# Altium PCB digital_input_module.PcbDoc
Units mm, origin at the board's own origin, x right, y up, seen from the top; angles counter-clockwise.
Board outline 50 x 40 mm, 2 copper layers (Top Layer, Bottom Layer); 46 components, 27 nets, 116 pads, 44 vias.
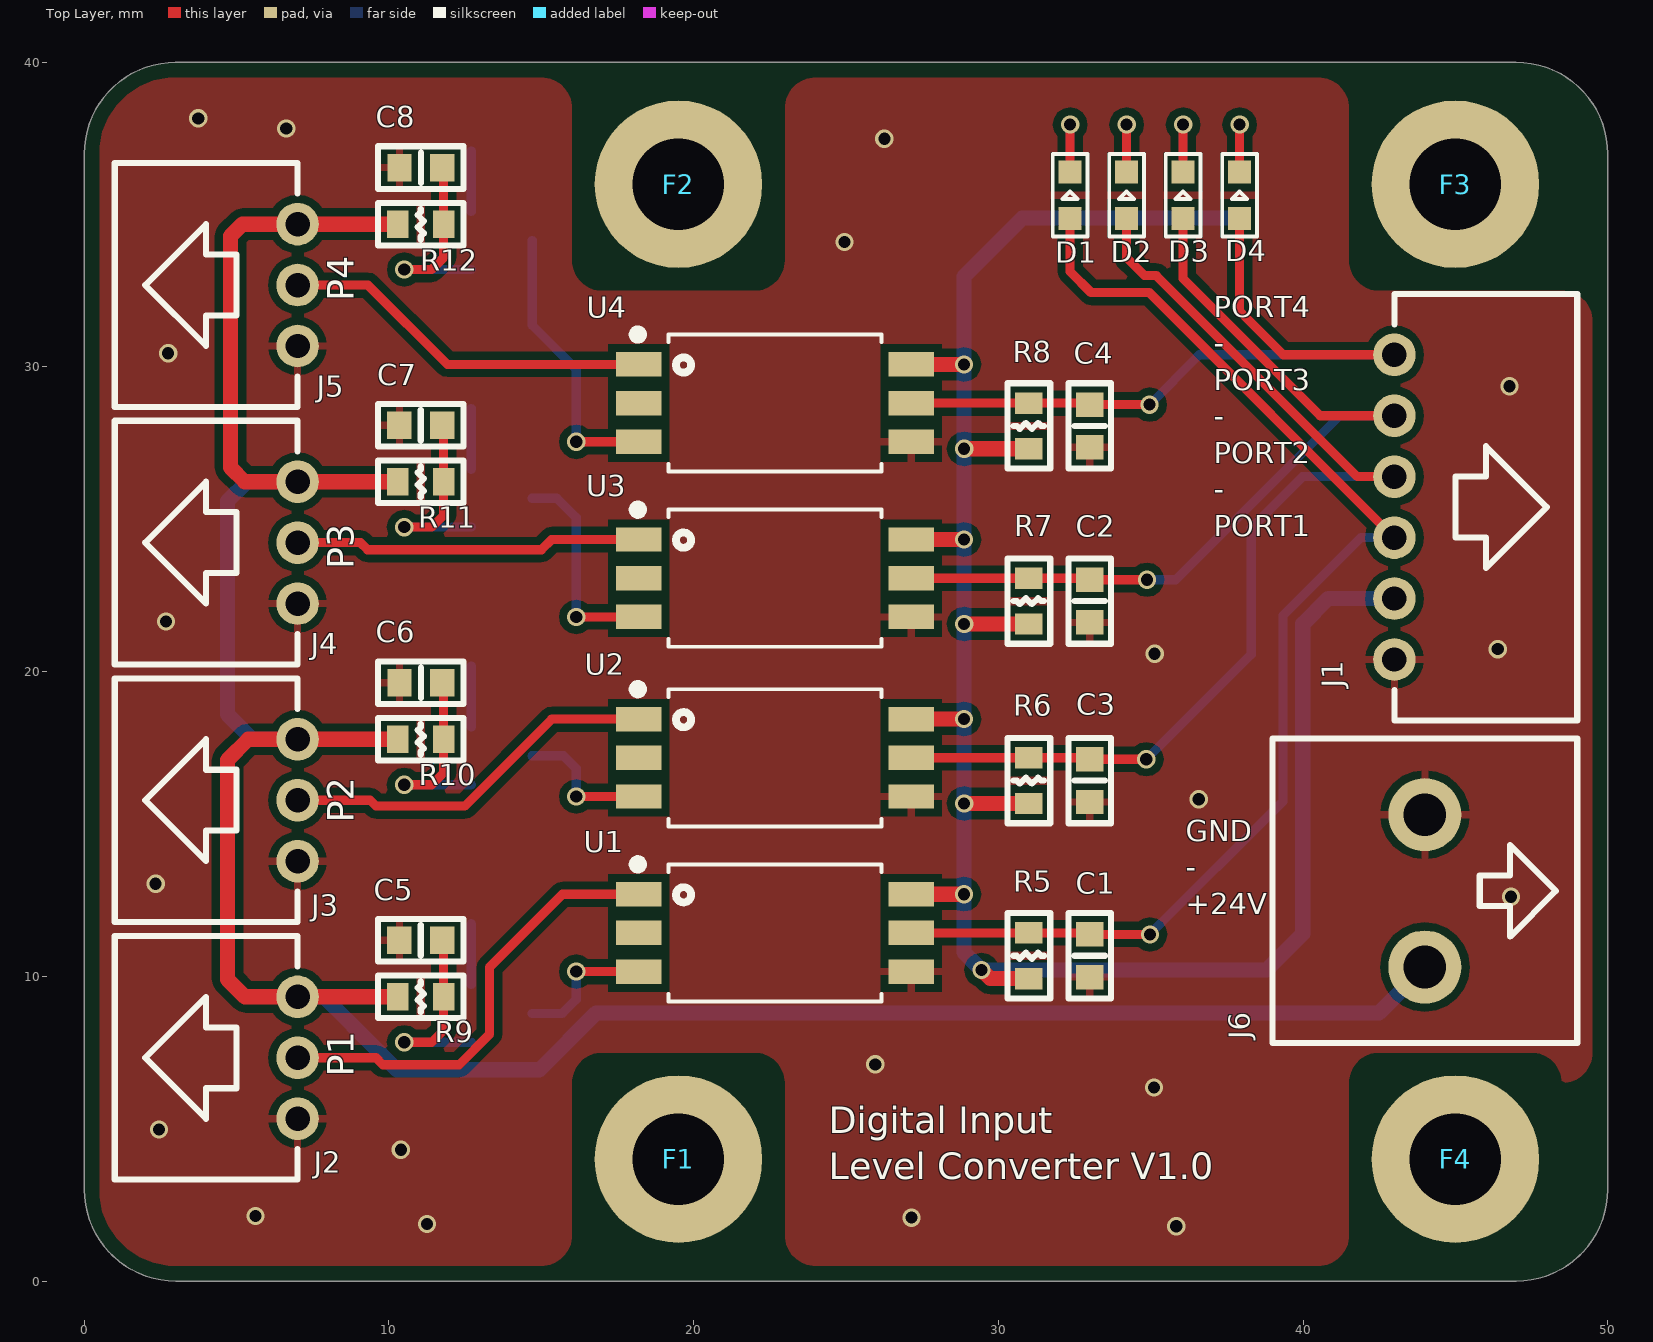
[diagram p0: Top Layer view]
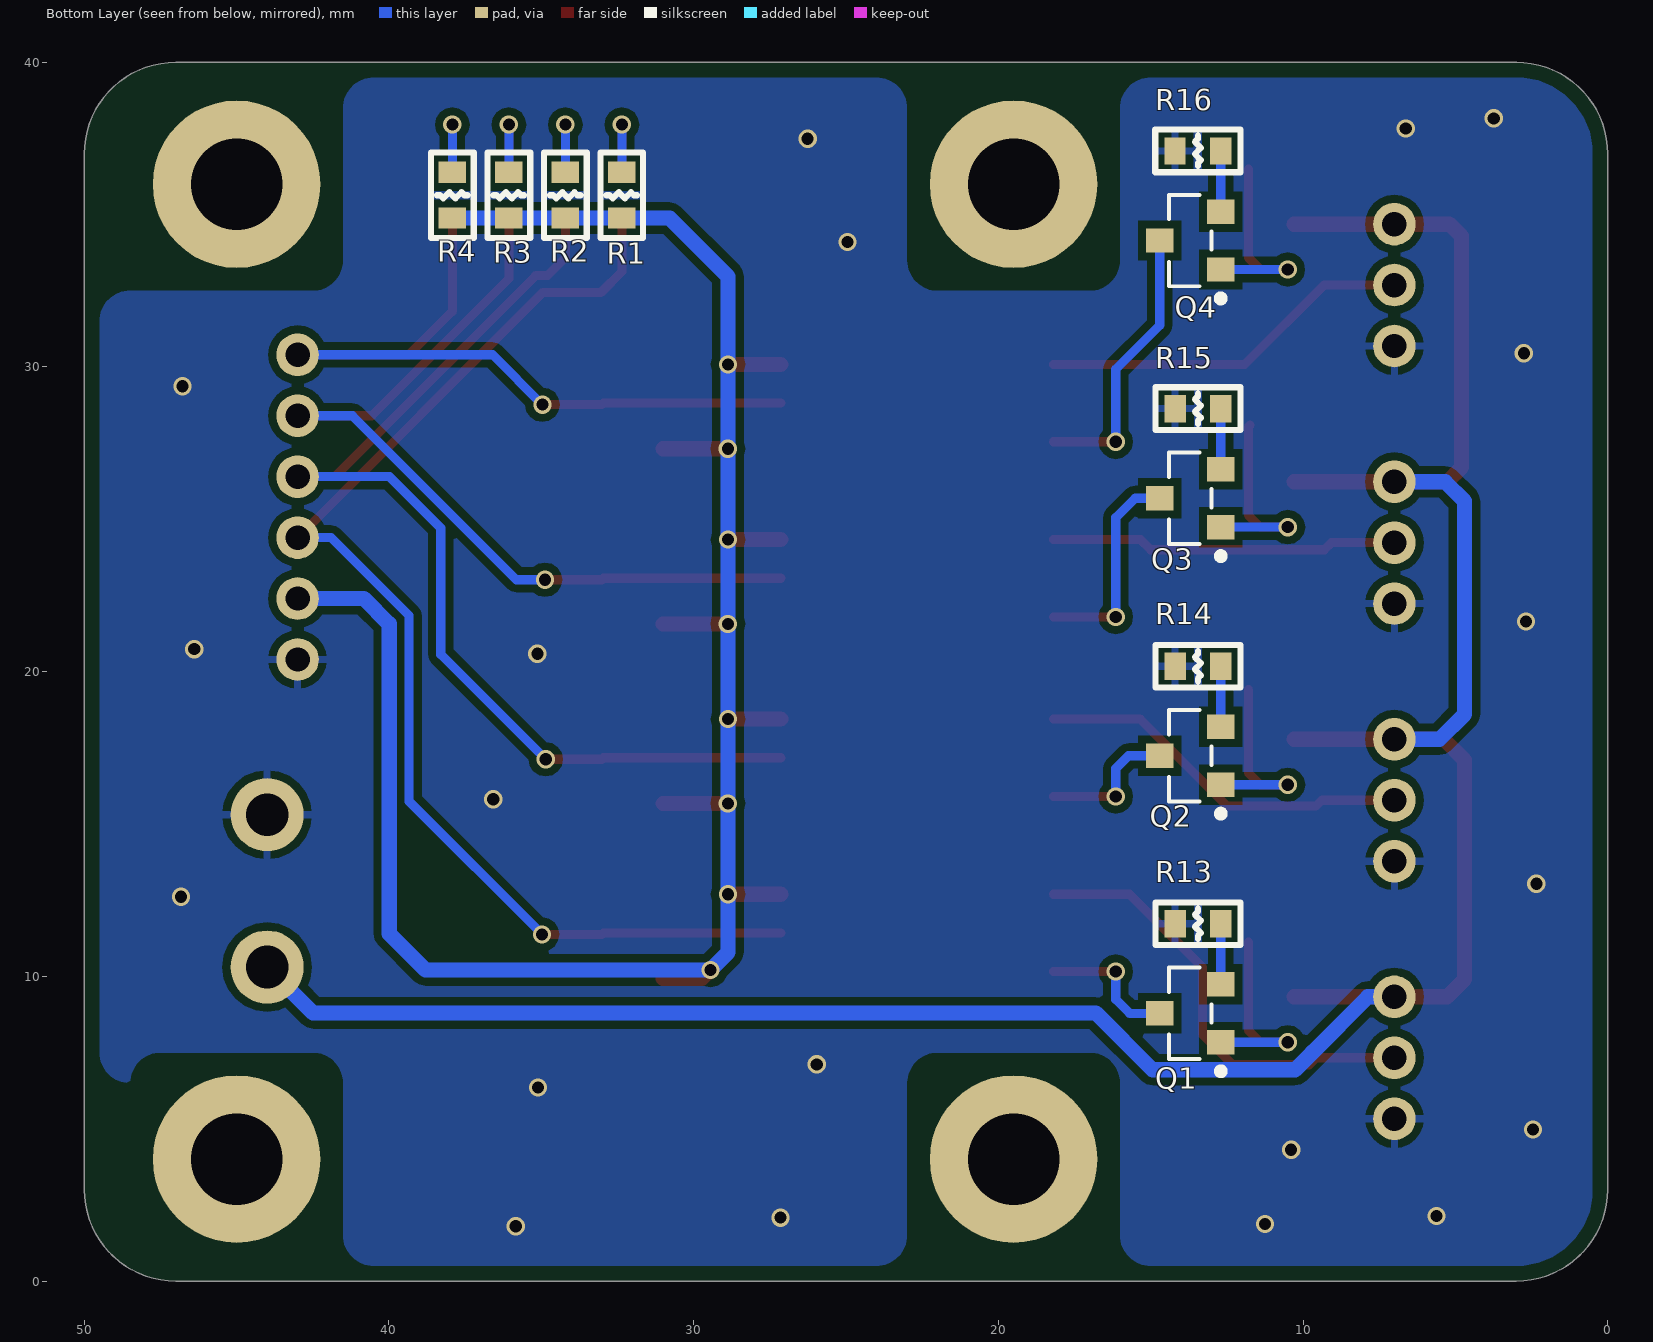
[diagram p1: Bottom Layer view, seen from below]
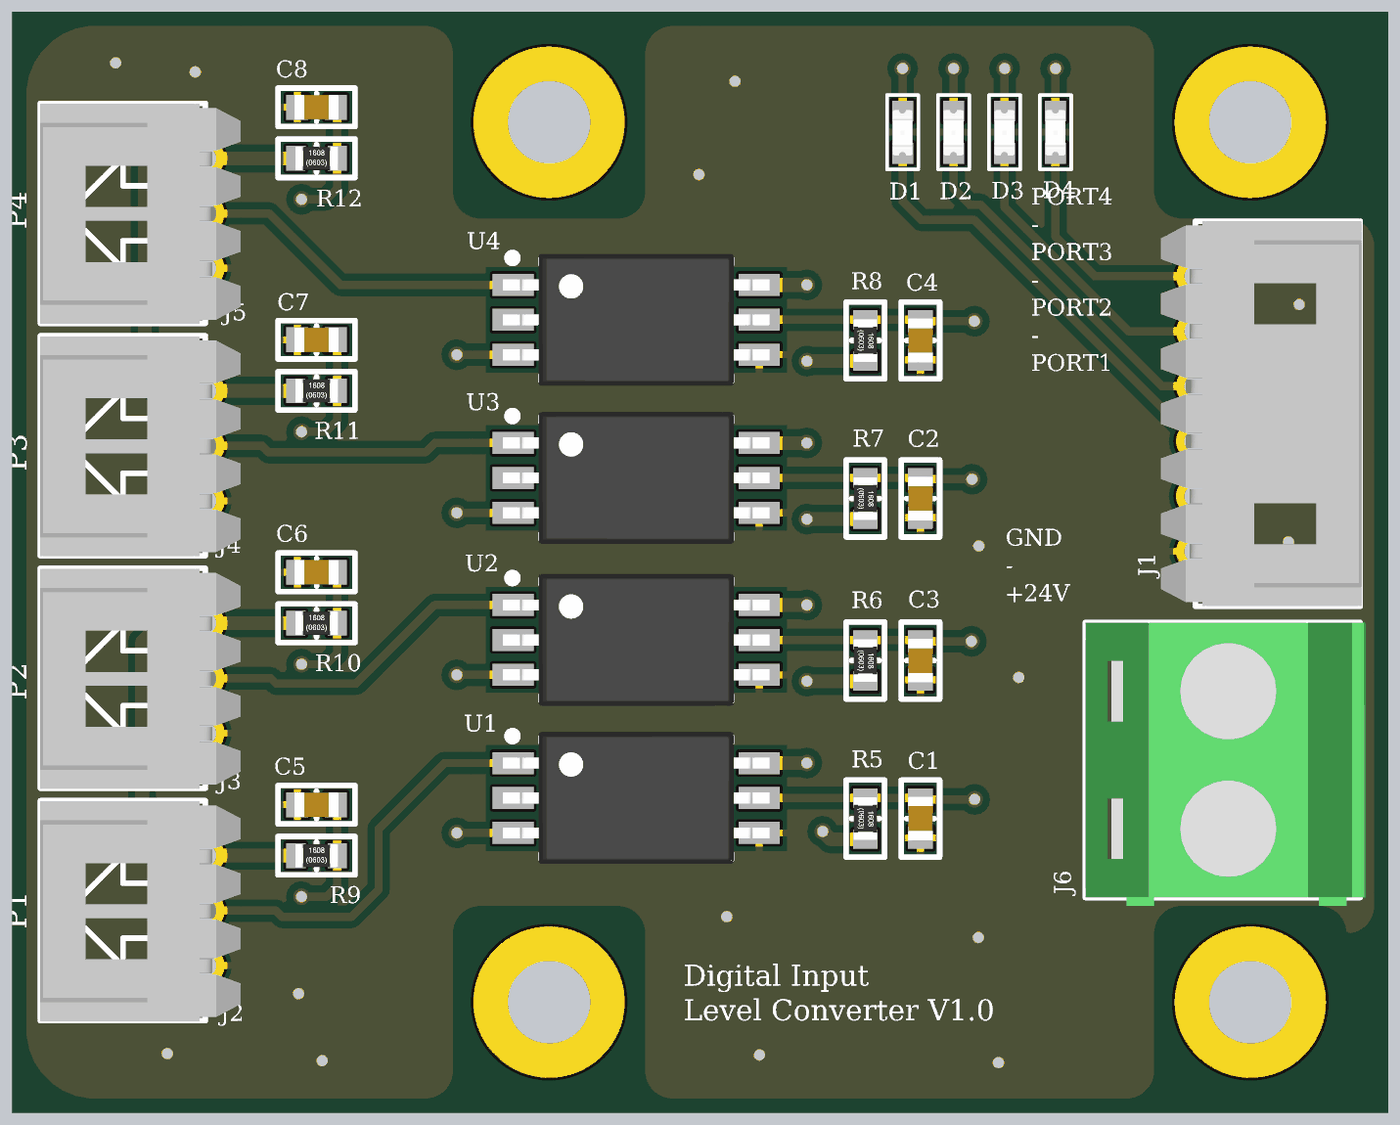
[diagram p2: 3D render of the assembled board from above, using the file's embedded part models]
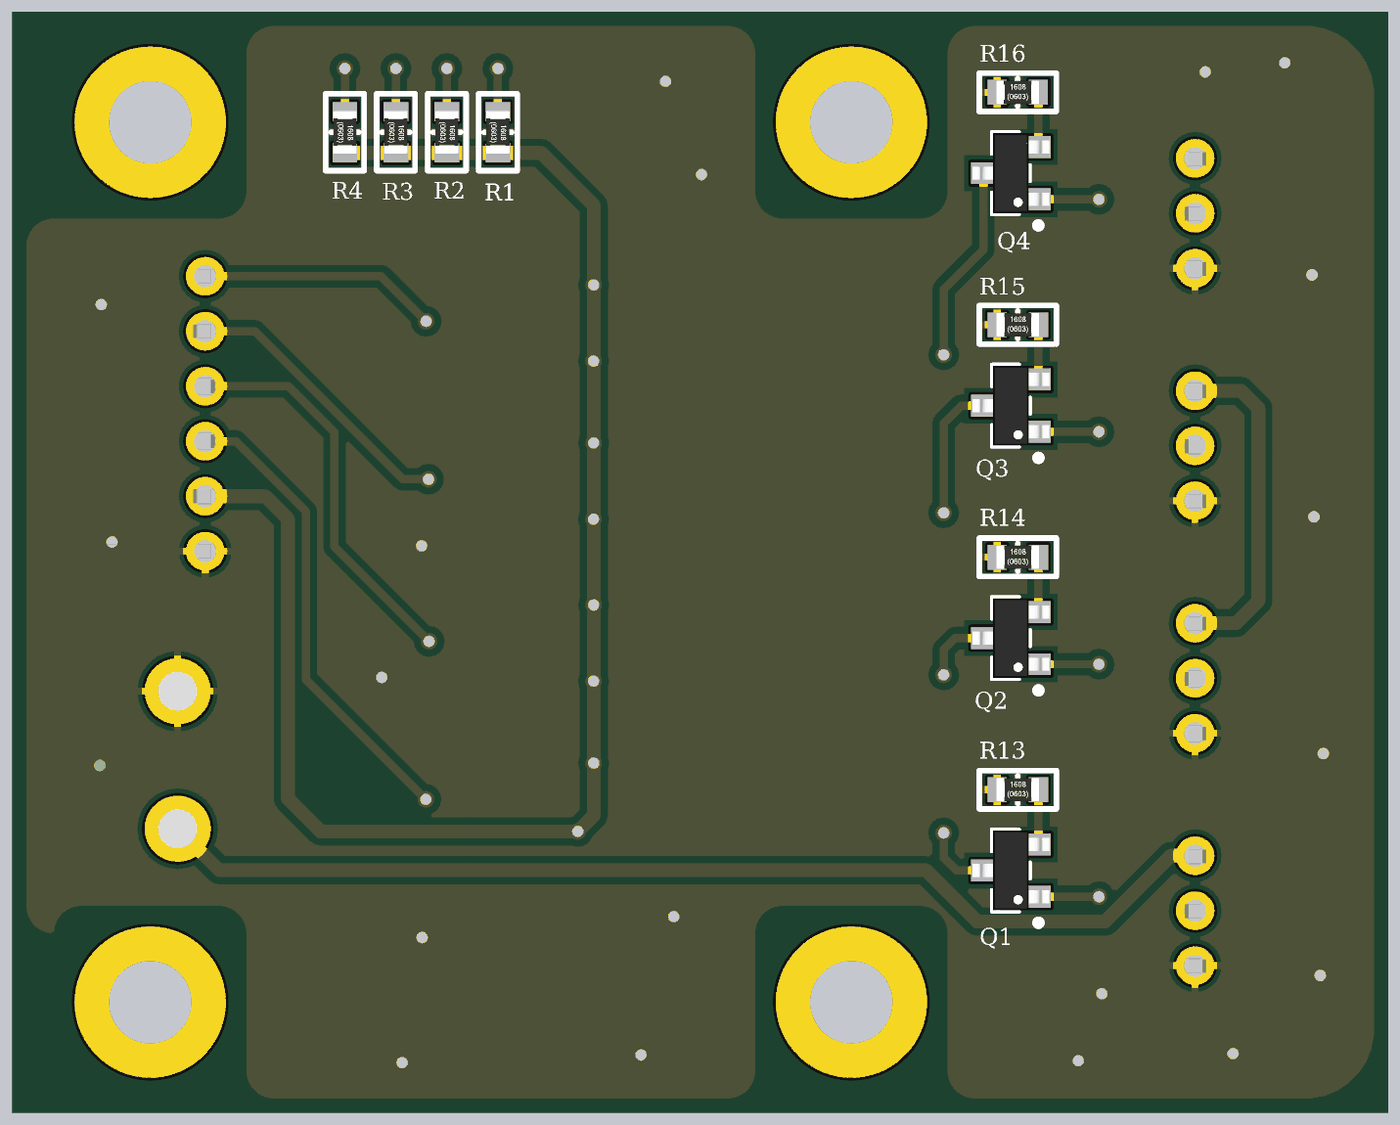
[diagram p3: 3D render of the assembled board from below, using the file's embedded part models]

## Layer stack, top to bottom
Top Solder: solder mask 0.0102, Solder Resist, Dk 3.5
Top Layer: signal copper 0.0356
Dielectric 1: dielectric 0.32, FR-4, Dk 4.8
Bottom Layer: signal copper 0.0356
Bottom Solder: solder mask 0.0102, Solder Resist, Dk 3.5

## Board outline
0,3 0,37 cw(c3,37) 3,40 47,40 cw(c47,37) 50,37 50,3 cw(c47,3) 47,0 3,0 cw(c3,3)

## Design rules (kind name [scope] priority, off if disabled: settings)
Clearance [All] p1: gap=0.254 ignorepadtopadclearanceinfootprint=FALSE except(0: Arc-Hole Track-Hole SMDPad-Hole THPad-Hole Via-Hole Fill-Hole Poly-Hole Region-Hole Text-Hole)
HoleSize [All] p1: absolutevalues=TRUE maxlimit=3.1 minlimit=0.025 maxpercent=80.000 minpercent=20.000
PolygonConnect [IsVia] p1: connectstyle=Direct reliefconductorwidth=0.254 reliefentries=4 polygonreliefangle="90 Angle" airgapwidth=0.254
PolygonConnect PolygonConnect_1 [All] p2: connectstyle=Relief reliefconductorwidth=0.254 reliefentries=4 polygonreliefangle="90 Angle" airgapwidth=0.254
RoutingVias [All] p1: holewidth=0.4 width=0.6 viastyle="Through Hole" minholewidth=0.4 minwidth=0.6 maxholewidth=0.4 maxwidth=0.6
SilkToSolderMaskClearance [IsPad] p1: minsilkscreentomaskgap=0.1 clearancetoexposedcopper=TRUE
SolderMaskExpansion [All] p1: expansion=0.102
Width [All] p1: maxlimit=2 minlimit=0.2 preferedwidth=0.2
28 further rules are at their usual default settings.

## Components (designator, comment, footprint, x,y, rotation, side; value= is the part's Value field where it differs from the comment)
C1 "C" CAP1608L 33.004,10.676 r270 top value=0.1uF
C2 "C" CAP1608L 33.004,22.317 r270 top value=0.1uF
C3 "C" CAP1608L 33.004,16.424 r270 top value=0.1uF
C4 "C" CAP1608L 33.004,28.065 r270 top value=0.1uF
C5 "C" CAP1608L 11.042,11.18 r180 top value=0.1uF
C6 "C" CAP1608L 11.044,19.635 r180 top value=0.1uF
C7 "C" CAP1608L 11.042,28.089 r180 top value=0.1uF
C8 "C" CAP1608L 11.044,36.545 r180 top value=0.1uF
D1 "LED" LED1608L 32.356,35.638 r270 top
D2 "LED" LED1608L 34.211,35.638 r270 top
D3 "LED" LED1608L 36.065,35.638 r270 top
D4 "LED" LED1608L 37.919,35.638 r270 top
F1 "FIXED_HOLE" FIXED_HOLE_PAD 19.5,4 r0 top
F2 "FIXED_HOLE" FIXED_HOLE_PAD 19.5,36 r0 top
F3 "FIXED_HOLE" FIXED_HOLE_PAD 45,36 r0 top
F4 "FIXED_HOLE" FIXED_HOLE_PAD 45,4 r0 top
J1 "MCON-6" MOLEX-53254-0670 43,25.4 r90 top
J2 "MCON-3" MOLEX-53254-0370 7,7.326 r270 top
J3 "MCON-3" MOLEX-53254-0370 7,15.78 r270 top
J4 "MCON-3" MOLEX-53254-0370 7,24.235 r270 top
J5 "MCON-3" MOLEX-53254-0370 7,32.689 r270 top
J6 "CON2" DG128-5.0-02P 44,12.806 r90 top
Q1 "NTR4503N" SOT-23-3 13.698,8.785 r270 bottom
Q2 "NTR4503N" SOT-23-3 13.698,17.239 r270 bottom
Q3 "NTR4503N" SOT-23-3 13.698,25.694 r270 bottom
Q4 "NTR4503N" SOT-23-3 13.7,34.15 r270 bottom
R1 "R" RES1608L 32.356,35.638 r270 bottom value=1K
R2 "R" RES1608L 34.211,35.638 r270 bottom value=1K
R3 "R" RES1608L 36.065,35.638 r270 bottom value=1K
R4 "R" RES1608L 37.919,35.638 r270 bottom value=1K
R5 "R" RES1608L 31.004,10.676 r270 top value=10K
R6 "R" RES1608L 31.004,16.424 r270 top value=10K
R7 "R" RES1608L 31.004,22.317 r270 top value=10K
R8 "R" RES1608L 31.004,28.065 r270 top value=10K
R9 "R" RES1608L 11.042,9.326 r0 top value=1M
R10 "R" RES1608L 11.042,17.78 r0 top value=1M
R11 "R" RES1608L 11.042,26.235 r0 top value=1M
R12 "R" RES1608L 11.042,34.689 r0 top value=1M
R13 "R" RES1608L 13.448,11.726 r180 bottom value=1K
R14 "R" RES1608L 13.448,20.18 r180 bottom value=1K
R15 "R" RES1608L 13.448,28.635 r180 bottom value=1K
R16 "R" RES1608L 13.45,37.091 r180 bottom value=1K
U1 "FOD8163" SOP-6W 22.668,11.426 r0 top
U2 "FOD8163" SOP-6W 22.668,17.174 r0 top
U3 "FOD8163" SOP-6W 22.668,23.067 r0 top
U4 "FOD8163" SOP-6W 22.668,28.815 r0 top

## Footprints (in the part's own frame and the unit in brackets; to place one, negate y for a bottom-side part, rotate by r counter-clockwise, add the part's x,y. Pads: shape width x height; smd on the part's side, far side on the other; paste and mask are expansions set on the pad)
CAP1608L [mm]
  rect 0.8x0.9 smd: 1(-0.7,0) 2(0.7,0)
  silkscreen extent -1.4,-0.7 1.4,0.7, body extent -0.8,-0.45 0.8,0.45, height 0.8
DG128-5.0-02P [mm]
  round 2.4 hole 1.4: 1(2.5,0) 2(-2.5,0)
  silkscreen extent -5,-5 5,5, body extent -5.3,-5.2 5,5, height 14.1
FIXED_HOLE_PAD [mm]
  round 5.5 hole 3: 1(0,0)
LED1608L [mil]
  rect 30x30 smd: 1(-30,0) 2(30,0)
  silkscreen extent -53,-23 53,23, body extent -32,-14 33,14, height 27
MOLEX-53254-0370 [mm]
  round 1.4 hole 0.8: 1(-2,0) 2(0,0) 3(2,0)
  silkscreen extent -4,-6 4,0, body extent -3.98,-6.01 4.02,1.29, height 4.1
MOLEX-53254-0670 [mm]
  round 1.4 hole 0.8: 1(-5,0) 2(-3,0) 3(-1,0) 4(1,0) 5(3,0) 6(5,0)
  silkscreen extent -7,-6 7,0, body extent -7,-6.05 7,1.25, height 4.1
RES1608L [mm]
  rect 0.7x0.9 smd: 1(-0.75,0) 2(0.75,0)
  silkscreen extent -1.4,-0.7 1.4,0.7, body extent -0.77,-0.43 0.78,0.42, height 0.45
SOP-6W [mm]
  rect 1.5x0.8 smd: 1(-4.475,1.27) 2(-4.475,0) 3(-4.475,-1.27) 4(4.475,-1.27) 5(4.475,0) 6(4.475,1.27)
  silkscreen extent -4.7,-2.25 3.5,2.45, body extent -4.85,-2.4 4.85,2.4, height 3.18
SOT-23-3 [mm]
  rect 0.8x0.9 smd: 1(0.95,1) 2(-0.95,1) 3(0,-1)
  silkscreen extent -1.5,-0.7 2,1.1, body extent -1.45,-1.4 1.45,1.4, height 1.3

## Part data
C1 C2 C3 C4 C5 C6 C7 C8: "Non-polarized Capacitor"
J6: "Generic Connector 2 Pin"
Q1 Q2 Q3 Q4: "Power MOSFET,  30 V, 2.5 A, Single N?Channel, SOT?23", Supplier Part Number 1=863-NTR4503NST1G, Supplier 1=Mouser
R1 R2 R3 R4 R5 R6 R7 R8 R9 R10 R11 R12 R13 R14 R15 R16: "Resistor"
U1 U2 U3 U4: "Logic Output Optocouplers 3.3V/5V Logic Gate Optocoupler", Supplier Part Number 1=512-FOD8163, Supplier 1=Mouser

## Via types
v1: diameter 0.6, hole 0.4, Top Layer to Bottom Layer, tented both sides, 44 vias

## Nets (pads, with @x,y where several pads share a name; then routed paths per layer and width w, separated by ;. In a path a pad name is that pad's centre, name@x,y a point inside that pad or via, vN(x,y) a via of type N, cw(c..) or ccw(c..) an arc to the next point about the centre after c; other vN are vias at no path point)
+3.3V: J1.2 R1.2 R2.2 R3.2 R4.2 R5.2 R6.2 R7.2 R8.2 U1.6 U2.6 U3.6 U4.6 | length 72.4
  Top Layer w0.5: U1.6 v1(28.873,12.696) ; U2.6 v1(28.873,18.444) ; U3.6 v1(28.873,24.337) ; U4.6 v1(28.873,30.085) ; v1(28.878,15.674) R6.2 ; v1(28.878,21.567) R7.2 ; v1(28.878,27.315) R8.2 ; v1(29.45,10.21) 29.734,9.926 R5.2
  Bottom Layer w0.5: v1(28.878,27.315) v1@28.873,27.32 ; R4.2 R3.2 R2.2 R1.2 30.788,34.888 28.873,32.973 v1(28.873,30.085) v1@28.873,27.32 ; J1.2 40.825,22.4 39.994,21.569 39.994,11.4 38.804,10.21 v1(29.45,10.21) 28.873,10.787 v1(28.873,12.696) v1(28.873,18.444) v1(28.873,24.337) v1@28.873,27.32
+24V: J2.1 J3.1 J4.1 J5.1 J6.2 R9.1 R10.1 R11.1 R12.1 | length 89.4
  Top Layer w0.5: R9.1 J2.1 5.274,9.326 4.7,9.9 4.7,17.1 5.38,17.78 J3.1 R10.1 ; R11.1 J4.1 5.265,26.235 4.8,26.7 4.8,34.3 5.189,34.689 J5.1 R12.1
  Bottom Layer w0.5: J2.1 7.874,9.326 9.694,7.506 9.694,7.502 10.265,6.931 14.931,6.931 16.8,8.8 42.494,8.8 J6.2 ; J3.1 5.52,17.78 4.7,18.6 4.7,25.6 5.335,26.235 J4.1
GND: C1.2 C2.2 C3.2 C4.2 C5.2 C6.2 C7.2 C8.2 J1.1 J2.3 J3.3 J4.3 J5.3 J6.1 R13.1 R14.1 R15.1 R16.1 U1.4 U2.4 U3.4 U4.4
  other v1: 35.84,1.8 11.25,1.87 27.15,2.08 5.62,2.13 10.39,4.31 2.45,4.97 35.11,6.35 25.96,7.11 46.83,12.61 2.34,13.04 36.58,15.81 35.13,20.59 46.39,20.74 2.68,21.65 46.78,29.37 2.75,30.45 24.95,34.1 26.26,37.49 6.63,37.83 3.74,38.16
NetC1_1: C1.1 D1.2 J1.3 R5.1 U1.5 | length 40.8
  Top Layer w0.3: U1.5 R5.1 32.954,11.426 C1.1 v1(34.976,11.376) ; D1.2 32.356,33.133 33.043,32.446 34.954,32.446 J1.3
  Bottom Layer w0.3: v1(34.976,11.376) 39.34,15.74 39.34,21.84 41.9,24.4 J1.3
NetC2_1: C2.1 D3.2 J1.5 R7.1 U3.5 | length 28.9
  Top Layer w0.3: U3.5 R7.1 32.954,23.067 C2.1 v1(34.882,23.017) ; D3.2 36.065,32.902 40.567,28.4 J1.5
  Bottom Layer w0.3: v1(34.882,23.017) 35.817,23.017 41.2,28.4 J1.5
NetC3_1: C3.1 D2.2 J1.4 R6.1 U2.5 | length 35.2
  Top Layer w0.3: U2.5 R6.1 32.954,17.174 C3.1 v1(34.858,17.124) ; D2.2 34.211,33.589 34.8,33 35.184,33 41.784,26.4 J1.4
  Bottom Layer w0.3: v1(34.858,17.124) 38.3,20.566 38.3,24.717 39.983,26.4 J1.4
NetC4_1: C4.1 D4.2 J1.6 R8.1 U4.5 | length 25.3
  Top Layer w0.3: U4.5 R8.1 32.954,28.815 C4.1 v1(34.965,28.765) ; D4.2 37.919,31.831 39.35,30.4 J1.6
  Bottom Layer w0.3: v1(34.965,28.765) 36.6,30.4 J1.6
NetC5_1: C5.1 Q1.1 R9.2 | length 6.6
  Top Layer w0.3: v1(10.498,7.835) 11.398,7.835 11.792,8.23 R9.2 C5.1@11.792,11.13
  Bottom Layer w0.3: v1(10.498,7.835) Q1.1
NetC6_1: C6.1 Q2.1 R10.2 | length 6.6
  Top Layer w0.3: v1(10.498,16.289) 11.398,16.289 11.792,16.684 R10.2 ; R10.2@11.792,17.6 C6.1@11.792,19.404
  Bottom Layer w0.3: v1(10.498,16.289) Q2.1
NetC7_1: C7.1 Q3.1 R11.2 | length 6.6
  Top Layer w0.3: v1(10.498,24.744) 11.398,24.744 11.792,25.138 R11.2 11.792,28.039 C7.1
  Bottom Layer w0.3: v1(10.498,24.744) Q3.1
NetC8_1: C8.1 Q4.1 R12.2 | length 6.6
  Top Layer w0.3: v1(10.5,33.2) 11.4,33.2 11.794,33.594 11.794,34.691 C8.1@11.794,36.495
  Bottom Layer w0.3: v1(10.5,33.2) Q4.1
NetD1_1: D1.1 R1.1 | length 3.1
  Top Layer w0.3: D1.1 v1(32.356,37.956)
  Bottom Layer w0.3: R1.1 v1(32.356,37.956)
NetD2_1: D2.1 R2.1 | length 3.1
  Top Layer w0.3: D2.1 v1(34.211,37.956)
  Bottom Layer w0.3: R2.1 v1(34.211,37.956)
NetD3_1: D3.1 R3.1 | length 3.1
  Top Layer w0.3: D3.1 v1(36.065,37.956)
  Bottom Layer w0.3: R3.1 v1(36.065,37.956)
NetD4_1: D4.1 R4.1 | length 3.1
  Top Layer w0.3: D4.1 v1(37.919,37.956)
  Bottom Layer w0.3: R4.1 v1(37.919,37.956)
NetJ2_2: J2.2 U1.1 | length 14.9
  Top Layer w0.3: J2.2 9.574,7.326 9.8,7.1 12.3,7.1 13.3,8.1 13.3,10.3 15.696,12.696 U1.1
NetJ3_2: J3.2 U2.1 | length 12.5
  Top Layer w0.3: J3.2 9.38,15.78 9.575,15.585 12.485,15.585 15.344,18.444 U2.1
NetJ4_2: J4.2 U3.1 | length 11.4
  Top Layer w0.3: J4.2 9.065,24.235 9.3,24 15,24 15.337,24.337 U3.1
NetJ5_2: J5.2 U4.1 | length 12.3
  Top Layer w0.3: J5.2 9.311,32.689 11.915,30.085 U4.1
NetQ1_2: Q1.2 R13.2 | length 2
  Bottom Layer w0.3: Q1.2 R13.2
NetQ1_3: Q1.3 U1.3 | length 4.6
  Top Layer w0.3: v1(16.145,10.156) U1.3
  Bottom Layer w0.3: Q1.3 15.685,8.785 16.145,9.245 v1(16.145,10.156)
NetQ2_2: Q2.2 R14.2 | length 2
  Bottom Layer w0.3: Q2.2 R14.2
NetQ2_3: Q2.3 U2.3 | length 4.6
  Top Layer w0.3: v1(16.145,15.904) U2.3
  Bottom Layer w0.3: Q2.3 15.728,17.239 16.145,16.822 v1(16.145,15.904)
NetQ3_2: Q3.2 R15.2 | length 2
  Bottom Layer w0.3: Q3.2 R15.2
NetQ3_3: Q3.3 U3.3 | length 7
  Top Layer w0.3: v1(16.145,21.797) U3.3
  Bottom Layer w0.3: Q3.3 15.506,25.694 16.145,25.055 v1(16.145,21.797)
NetQ4_2: Q4.2 R16.2 | length 2
  Bottom Layer w0.3: Q4.2 R16.2
NetQ4_3: Q4.3 U4.3 | length 9.3
  Top Layer w0.3: v1(16.145,27.545) U4.3
  Bottom Layer w0.3: Q4.3 14.7,31.369 16.145,29.924 v1(16.145,27.545)
pads on no net: F1.1 F2.1 F3.1 F4.1 U1.2 U2.2 U3.2 U4.2

## Polygon pours and split planes (outlines as drawn)
GND on Bottom Layer "GND_L02_P008" (solid, remove dead copper, pour order 8): 3,39.5 ccw(c3,37) 0.5,37 0.5,3 ccw(c3,3) 3,0.5 15,0.5 ccw(c15,1.5) 16,1.5 16,6.5 cw(c17,6.5) 17,7.5 22,7.5 cw(c22,6.5) 23,6.5 23,1.5 ccw(c24,1.5) 24,0.5 40.5,0.5 ccw(c40.5,1.5) 41.5,1.5 41.5,6.5 cw(c42.5,6.5) 42.5,7.5 47.5,7.5 cw(c47.5,6.5) 48.5,6.5 ccw(c48.5,7.5) 49.5,7.5 49.5,31.5 ccw(c48.5,31.5) 48.5,32.5 42.5,32.5 cw(c42.5,33.5) 41.5,33.5 41.5,38.5 ccw(c40.5,38.5) 40.5,39.5 24,39.5 ccw(c24,38.5) 23,38.5 23,33.5 cw(c22,33.5) 22,32.5 17,32.5 cw(c17,33.5) 16,33.5 16,38.5 ccw(c15,38.5) 15,39.5
GND on Top Layer "GND_L01_P010" (solid, remove dead copper, pour order 10): 3,39.5 ccw(c3,37) 0.5,37 0.5,3 ccw(c3,3) 3,0.5 15,0.5 ccw(c15,1.5) 16,1.5 16,6.5 cw(c17,6.5) 17,7.5 22,7.5 cw(c22,6.5) 23,6.5 23,1.5 ccw(c24,1.5) 24,0.5 40.5,0.5 ccw(c40.5,1.5) 41.5,1.5 41.5,6.5 cw(c42.5,6.5) 42.5,7.5 47.5,7.5 cw(c47.5,6.5) 48.5,6.5 ccw(c48.5,7.5) 49.5,7.5 49.5,31.5 ccw(c48.5,31.5) 48.5,32.5 42.5,32.5 cw(c42.5,33.5) 41.5,33.5 41.5,38.5 ccw(c40.5,38.5) 40.5,39.5 24,39.5 ccw(c24,38.5) 23,38.5 23,33.5 cw(c22,33.5) 22,32.5 17,32.5 cw(c17,33.5) 16,33.5 16,38.5 ccw(c15,38.5) 15,39.5

## Silkscreen, mask and mechanical layers (free items; w line width, h text height)
Top Overlay:
  text "P4" at 9.142,32.166 h1.5 r90
  text "PORT4 / - / PORT3 / - / PORT2 / - / PORT1" at 37.076,24.208 h1.2
  text "P3" at 9.142,23.356 h1.5 r90
  text "P2" at 9.142,15.036 h1.5 r90
  text "GND / - / +24V" at 36.146,11.808 h1.2
  text "P1" at 9.142,6.706 h1.5 r90
  text "Digital Input  / Level Converter V1.0" at 24.43,3.048 h1.5
Mechanical 1:
  the board outline again, w0.2